# Altium PCB UF_Servo.PcbDoc (part 4 of 12)
Units mm, origin at the board's own origin, x right, y up, seen from the top; angles counter-clockwise.
Board outline 222.63 x 100.1 mm, 6 copper layers (L1, L2, L3, L4, L5, L6), stack 1.609 mm thick; 1138 components, 775 nets, 3720 pads, 1641 vias.
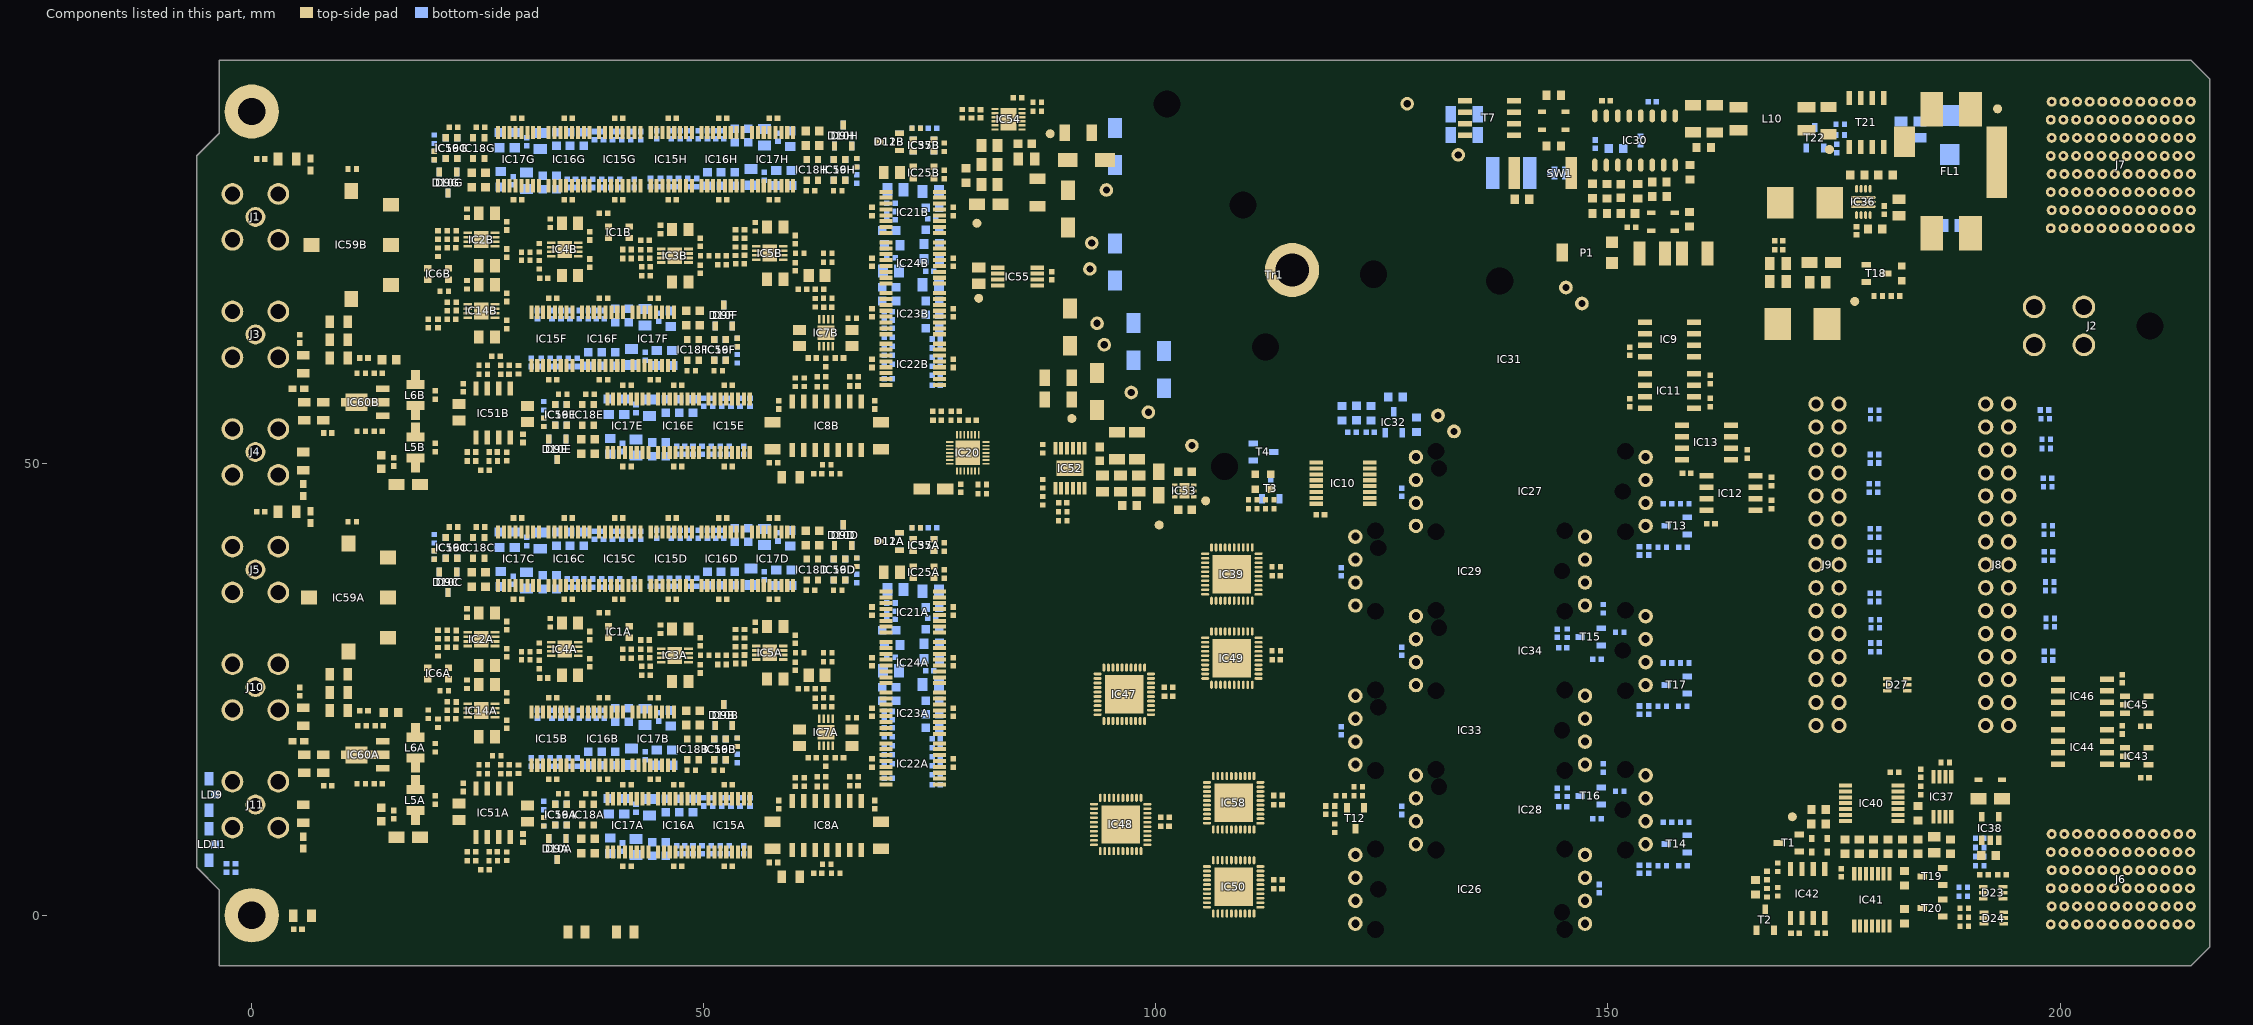
[diagram p7: the components of this part, seen from the top]

## Part data (continued)
C88A C88B: library part "0603 1uF 16V", "SMD Multilayer Ceramic Capacitor, 1 ï¿½F, 16 V, 0603 [1608 Metric], ï¿½ 5%, X7R", Case Code (Imperial)=0603, Case Code (Metric)=1608, Dielectric=X7R, Manufacturer=Yageo, Manufacturer Part Number=CC0603JRX7R7BB105, Max Operating Temperature=125°C, Min Operating Temperature=-55°C, Supplier Part Number=311-3485-1-ND, Tolerance=5%, Voltage Rating=16V, Case/Package=0603, Category="Ceramic Capacitors", ComponentLink1Description=http://www.yageo.com/documents/recent/UPY-GPHC_X7R_6.3V-to-50V_18.pdf?src-supplier=Digikey, ComponentLink1URL=http://www.yageo.com/documents/recent/UPY-GPHC_X7R_6.3V-to-50V_18.pdf?src-supplier=Digikey, ComponentLink2Description=https://www.yageo.com/upload/media/product/productsearch/datasheet/mlcc/UPY-GPHC_X7R_6.3V-to-50V_18.pdf?src-supplier=Digikey, ComponentLink2URL=https://www.yageo.com/upload/media/product/productsearch/datasheet/mlcc/UPY-GPHC_X7R_6.3V-to-50V_18.pdf?src-supplier=Digikey, ComponentLink3Description=https://datasheet.octopart.com/CC0603JRX7R7BB105-Yageo-datasheet-151948686.pdf?src-supplier=Farnell, ComponentLink3URL=https://datasheet.octopart.com/CC0603JRX7R7BB105-Yageo-datasheet-151948686.pdf?src-supplier=Farnell, ComponentLink4Description=https://datasheet.octopart.com/CC0603JRX7R7BB105-Yageo-datasheet-166511530.pdf?src-supplier=Future+Electronics, ComponentLink4URL=https://datasheet.octopart.com/CC0603JRX7R7BB105-Yageo-datasheet-166511530.pdf?src-supplier=Future+Electronics, ComponentLink5Description=https://datasheet.octopart.com/CC0603JRX7R7BB105-Yageo-datasheet-147453679.pdf?src-supplier=Newark, ComponentLink5URL=https://datasheet.octopart.com/CC0603JRX7R7BB105-Yageo-datasheet-147453679.pdf?src-supplier=Newark, Halogen Free=5694HalogenFree, Lead Free="Lead Free", Mounting Technology="Surface Mount", Packaging="Cut Tape", Pricing="1=0.2, 10=0.116, 100=0.0639, 1000=0.04383 (USD)", RoHS=Yes, Series=CC, Stock=7141, Supplier=Digikey, Voltage Rating (DC)=16V
C90A C90B C91A C91B: library part CC0402_470NF_16V_10%_X5R, "Non-polarised capacitor", Case=0402, Manufacturer=GENERIC, Manufacturer1 ComponentHeight=0.55mm, Manufacturer1 Example=TDK, Manufacturer1 Part Number=C1005X5R1C105KT, Tolerance=±10%, Voltage=16V, Author="CERN DEM JLC", Component Type=Standard, CreateDate=10/25/2012, HelpURL=\\cern.ch\dfs\Applications\Altium\Datasheets\CC0402_X5R_TDK_C.pdf, LatestRevisionDate=10/25/2012, Manufacturer Part Number=CC0402_470NF_16V_10%_X5R, Mounted=Yes, Part Description="SMD Multilayer Chip Ceramic Capacitor", Part Number=CC0402_470NF_16V_10%_X5R, Pin Count=2, Sense=No, SMD=Yes, Socket=No, Status=Preferred, TC=X5R
C130 C135: library part CC1206_10UF_25V_10%_X7R, "Non-polarised capacitor", Case=1206, Manufacturer=GENERIC, Manufacturer1 ComponentHeight=1.8mm, Manufacturer1 Example=KEMET, Manufacturer1 Part Number=C1206C106K4RACTU, Manufacturer Part Number=CC1206_10uF_25V_10%_X7R, Tolerance=±10%, Voltage=25V, Author="CERN DEM JLC", Component Type=Standard, CreateDate=2012-09-12, HelpURL=\\cern.ch\dfs\Applications\Altium\Datasheets\CC1206_X7R_KEMET.pdf, LatestRevisionDate=2012-09-12, Mounted=Yes, Part Description="SMD Multilayer Chip Ceramic Capacitor", Part Number=CC1206_10UF_25V_10%_X7R, Pin Count=2, SMD=Yes, Socket=No, Status=Preferred, Table="Capacitors SMD", TC=X7R
C137: library part CC1812_100NF_500V_10%_X7R, "Non-polarised capacitor", Case=1812, Manufacturer=GENERIC, Manufacturer1 ComponentHeight=2.5mm, Manufacturer1 Example=SYFER, Manufacturer1 Part Number=1812Y5000104KXB, Tolerance=±10%, Voltage=500V, Author="CERN DEM JMW", Component Type=Standard, CreateDate=1/23/2009, HelpURL=\\cern.ch\dfs\Applications\Altium\Datasheets\CC1812_X7R_SYFER.pdf, LatestRevisionDate=6/7/2011, Manufacturer Part Number=CC1812_100NF_500V_10%_X7R, Mounted=Yes, Part Description="SMD Multilayer Chip Ceramic Capacitor", Part Number=CC1812_100NF_500V_10%_X7R, Pin Count=2, Sense=No, SMD=Yes, Socket=No, Status=None, TC=X7R
C138 C146: library part CC0603_270PF_50V_5%_NP0, "Non-polarised capacitor", Case=0603, Manufacturer=GENERIC, Manufacturer1 ComponentHeight=0.87mm, Manufacturer1 Example=PHYCOMP, Manufacturer1 Part Number=223886715271, Tolerance=±5%, Voltage=50V, Author="CERN DEM JLC", Component Type=Standard, CreateDate=12/3/2007, HelpURL=\\cern.ch\dfs\Applications\Altium\Datasheets\CC0603_NP0_PHYCOMP.pdf, LatestRevisionDate=12/3/2007, Manufacturer Part Number=CC0603_270PF_50V_5%_NP0, Mounted=Yes, Part Description="SMD Multilayer Chip Ceramic Capacitor", Part Number=CC0603_270PF_50V_5%_NP0, Pin Count=2, Sense=No, SMD=Yes, Socket=No, Status=Preferred, TC=C0G/NP0
C139 C140: library part CMIC1210_220PF_100V_0.5PF_CORNELL_MC12F, "Non-polarised capacitor", Case=1210, Manufacturer="CORNELL DUBILIER", Manufacturer Part Number=MC12FA221D-F, Tolerance=±0.5pF, Voltage=100V, Author="CERN DEM JLC", Component Type=Standard, ComponentHeight=2mm, CreateDate=8/10/2011, HelpURL=\\cern.ch\dfs\Applications\Altium\Datasheets\CMIC1210_CORNELL_MC.pdf, LatestRevisionDate=8/10/2011, Mounted=Yes, Part Description="SMD RF Multilayer Mica Capacitor (Type MC)", Part Number=CMIC1210_220PF_100V_0.5PF_CORNELL_MC12F, Pin Count=2, Sense=No, SMD=Yes, Socket=No, Status="Not Recommended"
C142: library part CC0603_1NF_50V_5%_NP0, "Non-polarised capacitor", Case=0603, Manufacturer=GENERIC, Manufacturer1 ComponentHeight=0.9mm, Manufacturer1 Example="YAGEO PHYCOMP", Manufacturer1 Part Number=CC0603JRNPO9BN102, Tolerance=±5%, Voltage=50V, Author="CERN DEM JLC", Component Type=Standard, CreateDate=10/22/2012, HelpURL=\\cern.ch\dfs\Applications\Altium\Datasheets\CC0805_NP0_PHYCOMP_16VTO50V.pdf, LatestRevisionDate=10/22/2012, Manufacturer Part Number=CC0603_1NF_50V_5%_NP0, Mounted=Yes, Part Description="SMD Multilayer Chip Ceramic Capacitor", Part Number=CC0603_1NF_50V_5%_NP0, Pin Count=2, Sense=No, SMD=Yes, Socket=No, Status=Preferred, TC=C0G/NP0
C143 C144 C173 C182: library part CC0603_1UF_25V_10%_X7R, "Non-polarised capacitor", Case=0603, Manufacturer=GENERIC, Manufacturer1 ComponentHeight=0.9mm, Manufacturer1 Example=MURATA, Manufacturer1 Part Number=GRM188R71E105KA12D, Tolerance=±10%, Voltage=25V, Author="CERN DEM JLC", Component Type=Standard, HelpURL=\\cern.ch\dfs\Applications\Altium\Datasheets\CC0603_X7R_MURATA.pdf, Manufacturer Part Number=CC0603_1UF_25V_10%_X7R, Mounted=Yes, Part Description="SMD Multilayer Chip Ceramic Capacitor", Part Number=CC0603_1UF_25V_10%_X7R, Pin Count=2, Sense=No, SMD=Yes, Socket=No, Status=None, TC=X7R
  C143 C144: CreateDate=1/18/2011, LatestRevisionDate=1/18/2011
  C173 C182: CreateDate=18.01.2011, LatestRevisionDate=18.01.2011
C160 C161 C162 C165 C179 C210: library part CC0805_22UF_16V_10%_X5R, "Non-polarised capacitor", Case=0805, Manufacturer=GENERIC, Manufacturer1 ComponentHeight=1.35mm, Manufacturer1 Example=TDK, Manufacturer1 Part Number=C2012X5R1C226KT, Tolerance=±10%, Voltage=16V, Author="CERN DEM JLC", Component Type=Standard, CreateDate=25.10.2012, HelpURL=\\cern.ch\dfs\Applications\Altium\Datasheets\CC0805_X5R_TDK_C.pdf, LatestRevisionDate=25.10.2012, Manufacturer Part Number=CC0805_22UF_16V_10%_X5R, Mounted=Yes, Part Description="SMD Multilayer Chip Ceramic Capacitor", Part Number=CC0805_22UF_16V_10%_X5R, Pin Count=2, Sense=No, SMD=Yes, Socket=No, Status=Preferred, TC=X5R
C163 C195: library part CTE3216-18_10UF_16V_20%_AVX_TCJ, "Polarised capacitor", Case=A, Manufacturer=AVX, Manufacturer Part Number=TCJA106M016R0200, Tolerance=±20%, Voltage=16V, Author="CERN DEM JLC", Component Type=Standard, ComponentHeight=1.8mm, CreateDate=29.03.2012, HelpURL=\\cern.ch\dfs\Applications\Altium\Datasheets\CTE_AVX_TCJ.pdf, LatestRevisionDate=29.03.2012, Mounted=Yes, Part Description="ESR 0R200 Tantalum Solid Electrolytic Chip Capacitor with Conductive Polymer Electrode", Part Number=CTE3216-18_10UF_16V_20%_AVX_TCJ, Pin Count=2, Sense=No, SMD=Yes, Socket=No, Status=Preferred
C174: library part CTE3216-18_4.7UF_10V_10%_AVX_TPSA475K010T1400, "Polarised capacitor", Case=A, Manufacturer=AVX, Manufacturer Part Number=TPSA475K010T1400, Tolerance=±10%, Voltage=10V, Author="CERN DEM JLC", Component Type=Standard, ComponentHeight=1.8mm, CreateDate=23.01.2018, HelpURL=\\cern.ch\dfs\Applications\Altium\Datasheets\CTE-LESR_AVX_TPS-AUTO.pdf, LatestRevisionDate=23.01.2018, Mounted=Yes, Part Description="Low ESR 1R4 Automotive Solid Tantalum Chip Capacitor", Part Number=CTE3216-18_4.7UF_10V_10%_AVX_TPSA475K010T1400, Pin Count=2, Sense=No, SMD=Yes, Socket=No, Status=Preferred
C183A C183B: library part "0805 10uF 16V", "Multilayer Ceramic Capacitors MLCC - SMD/SMT 10V 10uF X7R 0805 5% AEC-Q200", Case Code (Imperial)=0805, Case Code (Metric)=2012, Dielectric=X7R, Dielectric Material=Ceramic, Manufacturer=KEMET, Manufacturer Part Number=C0805C106J8RACAUTO, Max Operating Temperature=125°C, Min Operating Temperature=-55°C, Ratings=AEC-Q200, Supplier Part Number=399-15693-1-ND, Tolerance=5%, Voltage Rating=10V, Case/Package=0805, Category="Ceramic Capacitors", ComponentLink1Description=http://www.farnell.com/datasheets/2741399.pdf?src-supplier=Farnell, ComponentLink1URL=http://www.farnell.com/datasheets/2741399.pdf?src-supplier=Farnell, ComponentLink2Description=http://www.farnell.com/datasheets/2741399.pdf?src-supplier=Element14, ComponentLink2URL=http://www.farnell.com/datasheets/2741399.pdf?src-supplier=Element14, ComponentLink3Description=https://datasheet.octopart.com/C0805C106J8RACAUTO-KEMET-datasheet-149523940.pdf?src-supplier=Farnell, ComponentLink3URL=https://datasheet.octopart.com/C0805C106J8RACAUTO-KEMET-datasheet-149523940.pdf?src-supplier=Farnell, ComponentLink4Description=https://api.kemet.com/component-edge/download/datasheet/C0805C106J8RACAUTO.pdf?src-supplier=Digikey, ComponentLink4URL=https://api.kemet.com/component-edge/download/datasheet/C0805C106J8RACAUTO.pdf?src-supplier=Digikey, ComponentLink5Description=http://www.farnell.com/datasheets/2741399.pdf?src-supplier=Newark, ComponentLink5URL=http://www.farnell.com/datasheets/2741399.pdf?src-supplier=Newark, ComponentLink6Description=https://datasheet.octopart.com/C0805C106J8RACAUTO-KEMET-datasheet-181957623.pdf?src-supplier=Newark, ComponentLink6URL=https://datasheet.octopart.com/C0805C106J8RACAUTO-KEMET-datasheet-181957623.pdf?src-supplier=Newark, ComponentLink7Description=https://datasheet.octopart.com/C0805C106J8RACAUTO-KEMET-datasheet-137036859.pdf?src-supplier=TME, ComponentLink7URL=https://datasheet.octopart.com/C0805C106J8RACAUTO-KEMET-datasheet-137036859.pdf?src-supplier=TME, Height=1.45mm, Material=Ceramic, Mounting Technology="Surface Mount", Packaging="Cut Tape", Pricing="1=0.88, 10=0.556, 100=0.3912, 1000=0.30524 (USD)", RoHS=Yes, RoHS Compliant=Yes, Series="SMD Auto X7R", Stock=9106, Supplier=Digikey, Voltage Rating (DC)=10V
C198 C204 C205 C211 C218A C218B: library part CC0603_4.7UF_25V_10%_X5R, "Non-polarised capacitor", Case=0603, Manufacturer=GENERIC, Manufacturer1 ComponentHeight=0.95mm, Manufacturer1 Example=MURATA, Manufacturer1 Part Number=GRM188R61E475KE11D, Tolerance=±10%, Voltage=25V, Author="CERN DEM JLC", Component Type=Standard, CreateDate=11/10/2014, HelpURL=\\cern.ch\dfs\Applications\Altium\Datasheets\CC0603_MURATA_GRM188R61E475KE11D.pdf, LatestRevisionDate=11/10/2014, Manufacturer Part Number=CC0603_4.7UF_25V_10%_X5R, Mounted=Yes, Part Description="SMD Multilayer Chip Ceramic Capacitor", Part Number=CC0603_4.7UF_25V_10%_X5R, Pin Count=2, Sense=No, SMD=Yes, Socket=No, Status=None, TC=X5R
C199 C206 C217A C217B: library part CTE3216-18_10UF_10V_10%_LESR1800, "Polarised capacitor", Case=A, Manufacturer=GENERIC, Manufacturer1 ComponentHeight=1.8mm, Manufacturer1 Example=AVX, Manufacturer1 Part Number=TPSA106K010R1800, Tolerance=±10%, Voltage=10V, Author="CERN DEM JLC", Component Type=Standard, CreateDate=5/5/2008, HelpURL=\\cern.ch\dfs\Applications\Altium\Datasheets\CTE-LESR_AVX_TPS.pdf, LatestRevisionDate=1/20/2009, Manufacturer Part Number=CTE3216-18_10UF_10V_10%_LESR1800, Mounted=Yes, Part Description="Low ESR 1R8 Solid Tantalum Chip Capacitor", Part Number=CTE3216-18_10UF_10V_10%_LESR1800, Pin Count=2, Sense=No, SMD=Yes, Socket=No, Status=Preferred
C214: library part CC0805_47UF_6.3V_10%_X5R, "Non-polarised capacitor", Case=0805, Manufacturer=GENERIC, Manufacturer1 ComponentHeight=1.4mm, Manufacturer1 Example=KEMET, Manufacturer1 Part Number=C0805C476K9PAC, Tolerance=±10%, Voltage=6.3V, Author="CERN DEM HF", Component Type=Standard, CreateDate=7/10/2023, HelpURL=\\cern.ch\dfs\Applications\Altium\Datasheets\CC0805_X5R_KEMET.pdf, LatestRevisionDate=7/10/2023, Manufacturer Part Number=CC0805_47UF_6.3V_10%_X5R, Mounted=Yes, Part Description="SMD Multilayer Chip Ceramic Capacitor", Part Number=CC0805_47UF_6.3V_10%_X5R, Pin Count=2, Sense=No, SMD=Yes, Socket=No, Status=Preferred, TC=X5R
C216A C216B C224A C224B: library part CC0402_47NF_25V_10%_X7R, "Non-polarised capacitor", Case=0402, Manufacturer=GENERIC, Manufacturer1 ComponentHeight=0.55mm, Manufacturer1 Example=TDK, Manufacturer1 Part Number=C1005X7R1E473K050, Tolerance=±10%, Voltage=25V, Author="CERN DEM JLC", Component Type=Standard, CreateDate=10/25/2012, HelpURL=\\cern.ch\dfs\Applications\Altium\Datasheets\CC0402_X7R_TDK_C.pdf, LatestRevisionDate=10/25/2012, Manufacturer Part Number=CC0402_47NF_25V_10%_X7R, Mounted=Yes, Part Description="SMD Multilayer Chip Ceramic Capacitor", Part Number=CC0402_47NF_25V_10%_X7R, Pin Count=2, Sense=No, SMD=Yes, Socket=No, Status=Preferred, TC=X7R
C225A C225B C226A C226B: library part CC0402_15PF_50V_5%_C0G, "Non-polarised capacitor", Case=0402, Manufacturer=GENERIC, Manufacturer1 ComponentHeight=0.55mm, Manufacturer1 Example=KEMET, Manufacturer1 Part Number=C0402C150J5GACTU, Tolerance=±5%, Voltage=50V, Author="CERN DEM JLC", Component Type=Standard, CreateDate=12/3/2007, HelpURL="\\cern.ch\dfs\Applications\Altium\Datasheets\CC0402_C0G_KEMET_(Commercial Grade).pdf", LatestRevisionDate=4/22/2015, Manufacturer Part Number=CC0402_15PF_50V_5%_C0G, Mounted=Yes, Part Description="SMD Multilayer Chip Ceramic Capacitor", Part Number=CC0402_15PF_50V_5%_C0G, Pin Count=2, Sense=No, SMD=Yes, Socket=No, Status=Preferred, TC=C0G/NP0
D1 D4 D7 D8: "Schottky Diode", Case=SOD-323, Manufacturer=INFINEON, Power=750mA, Voltage=40V, Author="CERN DEM JLC", Bonding=No, Component Type=Standard, ComponentHeight=1.1mm, CreateDate=11/12/2014, Device=BAT165, HelpURL=\\cern.ch\dfs\Applications\Altium\Datasheets\BAT165.pdf, LatestRevisionDate=11/12/2014, Manufacturer Part Number=BAT165, Mounted=Yes, PackageDescription="Small Outline Diode (SOD-323), 1.70mm W X 1.25mm L X 1.10mm H body,  IPC Medium Density", Part Description="Medium Power AF Schottky Diode", Part Number=BAT165, Pin Count=2, PressFit=No, Sense=No, SMD=Yes, Socket=No
D2 D3 D5 D6 D13 D14 D15 D16: "Schottky Diode", Case=DO-214AC, Manufacturer="VISHAY GENERAL SEMICONDUCTOR", Power=1A, Voltage=60V, Author="CERN DEM JLC", Bonding=No, Component Type=Standard, ComponentHeight=2.29mm, CreateDate=7/15/2008, Device=SS16, HelpURL=\\cern.ch\dfs\Applications\Altium\Datasheets\SS16.pdf, LatestRevisionDate=8/23/2010, Manufacturer Part Number=SS16, Mounted=Yes, PackageDescription="DO-214-AC/SMA Diode, Molded Body; 5.10mm L X 2.67mm W X 2.29mm H, IPC Medium Density", Part Description="Surface Mount Schottky Barrier Rectifier", Part Number=SS16, Pin Count=2, PressFit=No, Sense=No, SMD=Yes, Socket=No
D9A D9B D9C D9D D9E D9F D9G D9H D10A D10B D10C D10D D10E D10F D10G D10H D11A D11B D12A D12B: "Dual Common Cathode Varicap Diodes", Case=SOT23-3, Manufacturer="NXP SEMICONDUCTORS", Power=20mA, Voltage=15V, Author="CERN DEM JLC", Bonding=No, Component Type=Standard, ComponentHeight=1.1mm, CreateDate=12/16/2013, Device=BB201, HelpURL=\\cern.ch\dfs\Applications\Altium\Datasheets\BB201.pdf, LatestRevisionDate=12/16/2013, Manufacturer Part Number=BB201, Mounted=Yes, PackageDescription="SOT, 0.95mm Pitch; 3 Pin, 1.30mm W X 2.90mm L X 1.10mm H body, IPC Medium Density", Part Description="Dual Common Cathode Low-voltage Variable Capacitance Diode", Part Number=BB201, Pin Count=3, PressFit=No, Sense=No, SMD=Yes, Socket=No
D17A D17B D18A D18B D19A D19B: "Transient Voltage Suppressor Diode (Bi-Directional)", Case=0402, Manufacturer=EATON, Voltage=8kV, Author="CERN DEM MR", Bonding=No, Component Type=Standard, ComponentHeight=0.44mm, CreateDate=11/22/2019, Device=0402ESDA-MLP, HelpURL=\\cern.ch\dfs\Applications\Altium\Datasheets\0402ESDA-MLP.pdf, LatestRevisionDate=11/22/2019, Manufacturer Part Number=0402ESDA-MLP, Mounted=Yes, PackageDescription="0402, 2-Leads, Body 1.1mm L X 0.53mm W X 0.44mm H body, IPC Medium Density", Part Description="0.05pF 8kV Bidirectional ESD Voltage Suppressor", Part Number=0402ESDA-MLP, Pin Count=2, PressFit=No, Sense=No, SMD=Yes, Socket=No
D21: "Zener Diode", Case=DO-214AA, Manufacturer="FAIRCHILD SEMICONDUCTOR", Power=600W, Voltage=12V, Author="CERN DEM JLC", Bonding=No, Component Type=Standard, ComponentHeight=2.65mm, CreateDate=10.04.2013, Device=SMBJ12A, HelpURL=\\cern.ch\dfs\Applications\Altium\Datasheets\SMBJ.pdf, LatestRevisionDate=10.04.2013, Manufacturer Part Number=SMBJ12A, Mounted=Yes, PackageDescription="DO-214-AA/SMB Diode, Molded Body; 5.34mm L X 3.625mm W X 2.65mm H, IPC Medium Density", Part Description="Uni-Directional Transient Voltage Suppressor Diode", Part Number=SMBJ12A, Pin Count=2, PressFit=No, Sense=No, SMD=Yes, Socket=No
D22: "Schottky Diode", Case=SOD323, Manufacturer=INFINEON, Power=750mA, Voltage=40V, Author="CERN DEM JLC", Bonding=No, Component Type=Standard, ComponentHeight=1.1mm, CreateDate=12.11.2014, Device=BAT165, HelpURL=\\cern.ch\dfs\Applications\Altium\Datasheets\BAT165.pdf, LatestRevisionDate=12.11.2014, Manufacturer Part Number=BAT165, Mounted=Yes, PackageDescription="Small Outline Diode (SOD-323), 1.70mm W X 1.25mm L X 1.10mm H body,  IPC Medium Density", Part Description="Medium Power AF Schottky Diode", Part Number=BAT165, Pin Count=2, PressFit=No, Sense=No, SMD=Yes, Socket=No
D23 D24 D27: "Fivefold ESD Protection Diode Arrays", Case=SOT363, Manufacturer=NEXPERIA, Power=200W, Voltage=3.3V, Author="CERN DEM WB", Bonding=No, Component Type=Standard, ComponentHeight=1.1mm, CreateDate=05.07.2021, Device=PESD3V3L5UY, HelpURL=\\cern.ch\dfs\Applications\Altium\Datasheets\PESD3V3L5UY.pdf, LatestRevisionDate=05.07.2021, Manufacturer Part Number=PESD3V3L5UY, Mounted=Yes, PackageDescription="SOT363, SC-88, 0.65mm Pitch; 6 Pin, 1.25mm W X 2.00mm L X 1.10mm H body, IPC Medium Density", Part Description="Fivefold ESD Protection Diode Arrays (30kV)", Part Number=PESD3V3L5UY, Pin Count=6, PressFit=No, Sense=No, SMD=Yes, Socket=No
D25 D26: "Schottky Diode", Case=SOD-523F, Manufacturer=COMCHIP, Power=500mA, Voltage=20V, Author="CERN DEM HF", Bonding=No, Component Type=Standard, ComponentHeight=1mm, CreateDate=13.10.2023, Device=CDBU0520-HF, HelpURL=\\cern.ch\dfs\Applications\Altium\Datasheets\CDBU0520-HF.pdf, LatestRevisionDate=13.10.2023, Manufacturer Part Number=CDBU0520-HF, Mounted=Yes, PackageDescription="Small Outline Diode Flat Lead (SOD-523F), Body; 1.80mm L X 1mm W X 0.85mm H", Part Description="20V Surface mount Schottky Barrier Diode", Part Number=CDBU0520-HF, Pin Count=2, PressFit=No, Sense=No, SMD=Yes, Socket=No
FL1: library part FIL_MURATA_BNX022-01L, "Block Type EMIFIL (LC Combined)", Manufacturer=MURATA, Manufacturer Part Number=BNX022-01L, Resistance=0.5R, Author="CERN DEM JLC", Component Type=Standard, ComponentHeight=3.3mm, CreateDate=10.10.2012, HelpURL=\\cern.ch\dfs\Applications\Altium\Datasheets\FIL_MURATA_BNX022-01L.pdf, LatestRevisionDate=10.10.2012, Mounted=Yes, Part Description="Block Type EMIFIL (LC Combined) SMD Type, BNX02* Series", Part Number=FIL_MURATA_BNX022-01L, Pin Count=2, Sense=No, SMD=Yes, Socket=No, Status=None
IC1A IC1B IC6A IC6B IC18A IC18B IC18C IC18D IC18E IC18F IC18G IC18H IC19A IC19B IC19C IC19D IC19E IC19F IC19G IC19H IC25A IC25B IC35A IC35B IC56A IC56B IC56C IC56D IC56E IC56F IC56G IC56H IC57A IC57B: "PhotoMOS Relay", Case=SON4, Manufacturer=PANASONIC, Author="CERN DEM JLC", Bonding=No, Component Type=Standard, ComponentHeight=1.4mm, ComponentLink1Description="Package Drawing", ComponentLink1URL=\\cern.ch\dfs\Applications\Altium\Datasheets\AQY22_Package-Drawing.pdf, CreateDate=1/18/2010, Device=AQY221N3M, HelpURL=\\cern.ch\dfs\Applications\Altium\Datasheets\AQY221N3M.pdf, LatestRevisionDate=12/5/2018, Manufacturer Part Number=AQY221N3M, Mounted=Yes, PackageDescription="PANASONIC Serie AQY22(SON), 1.27mm Pitch; 4 Pin, 2.95mm W X 2.20mm L X 1.60mm H body", Part Description="RF SON 1 Form A, PhotoMOS Relay, CxR5 (On Res. 5.5Ohm, Out Cap. 1.1pF), 25V 150mA", Part Number=AQY221N3M, Pin Count=4, PressFit=No, Sense=No, SMD=Yes, Socket=No
IC2A IC2B IC3A IC3B IC4A IC4B IC5A IC5B IC7A IC7B IC14A IC14B: "Unity-Gain Stable, Ultralow Distortion, 1 nV/sqrt Hz Voltage Noise, High Speed Operational Amplifier", Case=SON8, Manufacturer="ANALOG DEVICES", Manufacturer Part Number=ADA4899-1YCP, Author="CERN DEM JLC", Bonding=No, Component Type=Standard, ComponentHeight=0.9mm, CreateDate=1/13/2010, Device=ADA4899-1YCPZ, HelpURL=\\cern.ch\dfs\Applications\Altium\Datasheets\ADA4899-1YCPZ.pdf, LatestRevisionDate=3/31/2022, Mounted=Yes, PackageDescription="SON (DFN), 0.50mm Pitch; 8 Pin, 3.00mm W X 3.00mm L X 0.90mm H body (w/Thermal Tab 1.60 X 1.89mm), IPC Medium Density", Part Description="Unity-Gain Stable, Ultralow Distortion, 1nV/sqrt Hz Voltage Noise, High Speed Operational Amplifier", Part Number=ADA4899-1YCPZ, Pin Count=8, PressFit=No, Sense=No, SMD=Yes, Socket=No
IC8A IC8B: "Ultra-Wideband, > 40-dB Gain Adjust Range, Linear in V/V Variable Gain Amplifier", Case=SOIC14, Manufacturer="TEXAS INSTRUMENTS", Author="CERN DEM HF", Bonding=No, Component Type=Standard, ComponentHeight=1.75mm, CreateDate=9/22/2022, Device=VCA824ID, HelpURL=\\cern.ch\dfs\Applications\Altium\Datasheets\VCA824.pdf, LatestRevisionDate=9/22/2022, Manufacturer Part Number=VCA824ID, Mounted=Yes, PackageDescription="SOIC 14, Pitch 1.27mm - Body 4x8.75mm, IPC Medium Density", Part Description="Ultra-Wideband, > 40-dB Gain Adjust Range, Linear in V/V Variable Gain Amplifier", Part Number=VCA824ID, Pin Count=14, PressFit=No, Sense=No, SMD=Yes, Socket=No
IC9: library part FIN1027A, "3.3V LVDS, 2-Bit, High-Speed, Differential Driver", Case=SOIC8, Manufacturer="ON Semiconductor", Author=GK, Bonding=No, Component Type=Standard, ComponentHeight=0.8mm, CreateDate=08/11/2016, Device=FIN1027AMX, HelpURL=\\cern.ch\dfs\Applications\Altium\Datasheets\FIN1101K8X.pdf, LatestRevisionDate=08/11/2016, Manufacturer Part Number=FIN1027AMX, Mounted=Yes, PackageDescription="SOIC 8, Pitch 1.27mm - Body 4x5mm, IPC Medium Density", Part Description="3.3V LVDS, 2-Bit, High-Speed, Differential Driver", Part Number=FIN1027AMX, Pin Count=8, PressFit=No, Sense=No, SMD=Yes, Socket=No
IC10: "3-Line to 8-Line Decoder/Demultiplexer", Case=TSSOP16, Manufacturer="NXP SEMICONDUCTORS", Author="CERN DEM JLC", Bonding=No, Component Type=Standard, ComponentHeight=1.1mm, CreateDate=6/9/2015, Device=74HC138PW, HelpURL=\\cern.ch\dfs\Applications\Altium\Datasheets\74HC138PW.pdf, LatestRevisionDate=6/9/2015, Manufacturer Part Number=74HC138PW, Mounted=Yes, PackageDescription="SOP, 0.65mm Pitch; 16 Pin, 4.40mm W X 5.00mm L X 1.10mm H body IPC Medium Density", Part Description="3-Line to 8-Line Decoder/Demultiplexer, Inverting", Part Number=74HC138PW, Pin Count=16, PressFit=No, Sense=No, SMD=Yes, Socket=No
IC11 IC12 IC13: library part FIN1028, "3.3V LVDS 2-Bit High-Speed Differential Reciever", Case=SOIC8, Manufacturer="ON Semiconductor", Author=GK, Bonding=No, Component Type=Standard, ComponentHeight=0.8mm, CreateDate=08/11/2016, Device=FIN1028MX, HelpURL=\\cern.ch\dfs\Applications\Altium\Datasheets\FIN1101K8X.pdf, LatestRevisionDate=08/11/2016, Manufacturer Part Number=FIN1028MX, Mounted=Yes, PackageDescription="SOIC 8, Pitch 1.27mm - Body 4x5mm, IPC Medium Density", Part Description="3.3V LVDS 2-Bit High-Speed Differential Reciever", Part Number=FIN1028MX, Pin Count=8, PressFit=No, Sense=No, SMD=Yes, Socket=No
IC15A IC15B IC15C IC15D IC15E IC15F IC15G IC15H IC16A IC16B IC16C IC16D IC16E IC16F IC16G IC16H IC17A IC17B IC17C IC17D IC17E IC17F IC17G IC17H IC21A IC21B IC22A IC22B IC23A IC23B IC24A IC24B: "DG211B Series SPST 22 V 50 Ohm Surface Mount Improved Analog Switch - TSSOP-16", Case/Package=TSSOP, Manufacturer="Vishay Siliconix", Max Dual Supply Voltage=22V, Max Operating Temperature=85°C, Max Power Dissipation=640mW, Max Supply Current=10uA, Max Supply Voltage=25V, Min Dual Supply Voltage=4.5V, Min Operating Temperature=-40°C, Package Quantity=3000, Supplier Part Number=DG211BDQ-T1-E3CT-ND, Supply Current=50uA, Category="Decoders and Multiplexers", ComponentLink1Description=https://datasheet.ciiva.com/26911/getdatasheetpartid-399112-26911024.pdf?src-supplier=Verical, ComponentLink1URL=https://datasheet.ciiva.com/26911/getdatasheetpartid-399112-26911024.pdf?src-supplier=Verical, ComponentLink2Description=https://datasheet.ciiva.com/23943/1759079-23943571.pdf?src-supplier=Newark, ComponentLink2URL=https://datasheet.ciiva.com/23943/1759079-23943571.pdf?src-supplier=Newark, ComponentLink3Description=https://datasheet.ciiva.com/6639/70040-6639199.pdf?src-supplier=Digikey, ComponentLink3URL=https://datasheet.ciiva.com/6639/70040-6639199.pdf?src-supplier=Digikey, Height=0.92mm, Lead Free="Lead Free", Length=5.08mm, Manufacturer Part Number=DG211BDQ-T1-E3, Min Supply Voltage=4.5V, Mounting Technology="Surface Mount", Number of Channels=4, Number of Circuits=4, Number of Inputs=4, Number of Outputs=4, Packaging="Tape and Reel", Pins=16, Power Dissipation=640mW, Pricing="1=2.28, 10=1.689, 25=1.5416, 100=1.3792, 250=1.30176, 500=1.2551, 1000=1.2167 (USD)", Radiation Hardening=No, Reach SVHC Compliant=Unknown, RoHS=Yes, RoHS Compliant=Yes, Series=-, Stock=12512, Supplier=Digikey, Supply Type=Single,Dual, Throw Configuration=SPST, Weight=0.006102oz, Width=4.4mm
IC20: "12-Bit nanoDAC+ with 2 ppm/°C Voltage Reference Temperature Coefficient, SPI Interface", Case=QFN28, Manufacturer="ANALOG DEVICES", Author="CERN DEM HF", Bonding=No, Component Type=Standard, ComponentHeight=1.0mm, CreateDate=4/19/2022, Device=AD5674RBCPZ-1, HelpURL=\\cern.ch\dfs\Applications\Altium\Datasheets\AD5674RBCPZ-1.pdf, LatestRevisionDate=4/19/2022, Manufacturer Part Number=AD5674RBCPZ-1, Mounted=Yes, PackageDescription="QFN, 0.40mm Pitch, Square; 28 Pin, 4.00mm L X 4.00mm W X 1.00mm H body (w/Thermal Tab 2.70 X 2.70mm), IPC Medium Density", Part Description="12-Bit nanoDAC+ with 2 ppm/°C Voltage Reference Temperature Coefficient, SPI Interface", Part Number=AD5674RBCPZ-1, Pin Count=28, PressFit=No, Sense=No, SMD=Yes, Socket=No
IC26 IC27 IC28 IC29 IC33 IC34: "High Voltage Galvanic Insulation Link for DC to 5MBaud", Manufacturer=BROADCOM, Author="CERN DEM HF", Bonding=No, Component Type=Standard, ComponentHeight=6.7mm, CreateDate=2/10/2022, Device=AFBR-390525RZ, HelpURL=\\cern.ch\dfs\Applications\Altium\Datasheets\AFBR-390525RZ.pdf, LatestRevisionDate=3/21/2022, Manufacturer Part Number=AFBR-390525RZ, Mounted=Yes, PackageDescription="BROADCOM AFBR-390525RZ Case, Body 30.46mm L X 10.16mm W X 6.7mm H", Part Description="High Voltage Galvanic Insulation Link for DC to 5MBaud, Length 25mm, 15kV Voltage Suppression", Part Number=AFBR-390525RZ, Pin Count=8, PressFit=No, Sense=No, SMD=No, Socket=No
IC30: "Improved high-voltage resonant controller", Case=SOP, Manufacturer=STMicroelectronics, Author="Michal Beldyga", Component Type=Standard, CreateDate=2/9/2025, Device=L6599AD, LastRevision=2/9/2025, Manufacturer Part Number=L6599AD, PackageDescription="SOP, 16-Leads, Body 9.90x3.90mm, Pitch 1.27mm, IPC Medium Density", Part Description="Improved high-voltage resonant controller", Part Number=L6599AD, Pin Count=16, Status=Active
IC31: "Optocoupler", Manufacturer="TT Electronics", Author="Michal Beldyga", Component Type=Standard, CreateDate=2/9/2025, Device=OPI1264C, LastRevision=2/9/2025, Manufacturer Part Number=OPI1264C, PackageDescription="Low‐cost plastic housing", Part Description="Optically Coupled Isolator", Part Number=OPI1264C, Pin Count=4, Status=Active
IC32: "Precision Reference 1=Cathode 2=Adj 3=Anode", Case=SOT23-3, Manufacturer="TEXAS INSTRUMENTS", Author="CERN DEM JMW", Bonding=No, Component Type=Standard, ComponentHeight=1.12mm, CreateDate=10/22/2015, Device=TL431AIDBZ, HelpURL=\\cern.ch\dfs\Applications\Altium\Datasheets\TL431AIDBZ.pdf, LatestRevisionDate=10/22/2015, Manufacturer Part Number=TL431AIDBZ, Mounted=Yes, PackageDescription="SOT, 0.95mm, Pitch; 3 Pin,1.30mm W X 2.92mm L X 1.12mm H body, IPC Medium Density", Part Description="Vref (2.495V) To 36V 1% Precision Programmable Reference", Part Number=TL431AIDBZ, Pin Count=3, PressFit=No, Sense=No, SMD=Yes, Socket=No
IC36: "3V-17V 2A Step-Down Converter, High Accuracy, With DCS-Control", Case=QFN14, Manufacturer="TEXAS INSTRUMENTS", Author="CERN DEM MR", Bonding=No, Component Type=Standard, ComponentHeight=1mm, CreateDate=08.02.2019, Device=TPS62148RGX, HelpURL=\\cern.ch\dfs\Applications\Altium\Datasheets\TPS62148RGX.pdf, LatestRevisionDate=08.02.2019, Manufacturer Part Number=TPS62148RGX, Mounted=Yes, PackageDescription="TEXAS Case Style (R-VQFN-HR-N11), 0.50mm Pitch, 11 Pin, 2.00mm W X 3.00mm L X 1.00mm H body", Part Description="3V-17V 2A Step-Down Converter, High Accuracy, with DCS-Control", Part Number=TPS62148RGX, Pin Count=11, PressFit=No, Sense=No, SMD=Yes, Socket=No
IC37: "Digital Temperature Sensor and Thermal Watchdog with Two-Wire Interface", Case=SSOP8, Manufacturer="TEXAS INSTRUMENTS", Author="CERN DEM JLC", Bonding=No, Component Type=Standard, ComponentHeight=1.09mm, CreateDate=15.10.2012, Device=LM75AIMM/NOPB, HelpURL=\\cern.ch\dfs\Applications\Altium\Datasheets\LM75AIMM-NOPB.pdf, LatestRevisionDate=15.10.2012, Manufacturer Part Number=LM75AIMM/NOPB, Mounted=Yes, PackageDescription="SOP, 0.65mm pitch; 8 pin,3.00mm W X 3.00mm L X 1.09mm H bodyI, PC Medium Density", Part Description="-25° to +100°C ±2°C Digital Temperature Sensor and Thermal Watchdog with Two-Wire Interface", Part Number=LM75AIMM/NOPB, Pin Count=8, PressFit=No, Sense=No, SMD=Yes, Socket=No
IC38: "500mA Peak Output LDO Regulator", Case=SOT23-5, Manufacturer="MICROCHIP TECHNOLOGY", Author="CERN DEM WB", Bonding=No, Component Type=Standard, ComponentHeight=1.45mm, CreateDate=2019-04-16, Device=MIC5219-3.3YM5, HelpURL=\\cern.ch\dfs\Applications\Altium\Datasheets\MIC5219-3.3YM5.pdf, LatestRevisionDate=2019-04-16, Manufacturer Part Number=MIC5219-3.3YM5, Mounted=Yes, PackageDescription="SOT, 0.95mm pitch; 5 pin, 1.60mm W X 2.90mm L X 1.45mm H body, IPC Medium Density", Part Description="3.3V 500mA Peak Output Low Drop-Out  (LDO) Regulator", Part Number=MIC5219-3.3YM5, Pin Count=5, PressFit=No, Sense=No, SMD=Yes, Socket=No
IC39 IC47 IC48 IC49 IC50 IC58: "4-Wire-Interfaced, 2.5V to 5.5V, 28-Port I/O Expander", Case=QFN40, Manufacturer=MAXIM, Manufacturer Part Number=MAX7301ATL, Author="CERN DEM BC", Bonding=No, Component Type=Standard, ComponentHeight=0.8mm, CreateDate=5/4/2020, Device=MAX7301ATL+, HelpURL=\\cern.ch\dfs\Applications\Altium\Datasheets\MAX7301ATL+.pdf, LatestRevisionDate=4/4/2022, Mounted=Yes, PackageDescription="QFN, 0.50mm Pitch, Square; 40 Pin, 6.00mm L X 6.00mm W X 0.80mm H body (w/Thermal Tab 4.25 X 4.25mm), IPC Medium Density", Part Description="4-Wire-Interfaced, 2.5V to 5.5V, 28-Port I/O Expander", Part Number=MAX7301ATL+, Pin Count=41, PressFit=No, Sense=No, SMD=Yes, Socket=No
IC40 IC41: Case=TSSOP14, Manufacturer="NXP SEMICONDUCTORS", Author="CERN DEM JLC", Bonding=No, Component Type=Standard, ComponentHeight=1.1mm, CreateDate=2014-11-19, Device=74HC4066PW, HelpURL=\\cern.ch\dfs\Applications\Altium\Datasheets\74HC4066PW.pdf, LatestRevisionDate=2014-11-19, Manufacturer Part Number=74HC4066PW, Mounted=Yes, PackageDescription="SOP, 14-Leads, Body 4.4x5mm (max), Pitch 0.65mm, IPC Medium Density", Part Description="Quad Single-Pole Single-Throw Analog Switch", Part Number=74HC4066PW, Pin Count=14, PressFit=No, SMD=Yes, Socket=No, Table="Standard Logic"
IC42: "LinCMOS Timer", Case=SOIC8, Manufacturer="TEXAS INSTRUMENTS", Author="CERN DEM JMW", Bonding=No, Component Type=Standard, ComponentHeight=1.75mm, CreateDate=23.08.2016, Device=TLC555ID, HelpURL=\\cern.ch\dfs\Applications\Altium\Datasheets\TLC555ID.pdf, LatestRevisionDate=23.08.2016, Manufacturer Part Number=TLC555ID, Mounted=Yes, PackageDescription="SOIC 8, Pitch 1.27mm, Body 4x5mm, IPC Medium Density", Part Description="LinCMOS Timer", Part Number=TLC555ID, Pin Count=8, PressFit=No, Sense=No, SMD=Yes, Socket=No
IC43 IC45: "1.7V-5.5V, 2K I2C Serial EEPROM With EUI-48 Node Identity", Case=SOT23-5, Manufacturer="MICROCHIP TECHNOLOGY", Author="CERN DEM MR", Bonding=No, Component Type=Standard, ComponentHeight=1.45mm, CreateDate=31.03.2016, Device=24AA02E48T-I/OT, HelpURL=\\cern.ch\dfs\Applications\Altium\Datasheets\24AA02E48T-I-OT.pdf, LatestRevisionDate=31.03.2016, Manufacturer Part Number=24AA02E48T-I/OT, Mounted=Yes, PackageDescription="SOT, 0.95mm pitch; 5 pin, 1.60mm W X 2.90mm L X 1.45mm H body, IPC Medium Density", Part Description="1.7V-5.5V, 2K I2C Serial EEPROM with EUI-48 Node Identity", Part Number=24AA02E48T-I/OT, Pin Count=5, PressFit=No, Sense=No, SMD=Yes, Socket=No
IC44 IC46: "1.7V-5.5V, 2K I2C™ Serial EEPROMs with EUI-48™ Node Identity", Case=SOIC8, Manufacturer="MICROCHIP TECHNOLOGY", Author="CERN DEM MR", Bonding=No, Component Type=Standard, ComponentHeight=1.75mm, CreateDate=19.07.2016, Device=24AA025E48-I/SN, HelpURL=\\cern.ch\dfs\Applications\Altium\Datasheets\24AA025E48-I-SN.pdf, LatestRevisionDate=19.07.2016, Manufacturer Part Number=24AA025E48-I/SN, Mounted=Yes, PackageDescription="SOIC 8, Pitch 1.27mm - Body 4x5mm, IPC Medium Density", Part Description="1.7V-5.5V, 2K I2C™ Serial EEPROMs with EUI-48™ Node Identity", Part Number=24AA025E48-I/SN, Pin Count=8, PressFit=No, Sense=No, SMD=Yes, Socket=No
IC51A IC51B: "Dual Operational Amplifier", Case=SOIC8, Manufacturer="ANALOG DEVICES", Manufacturer Part Number=ADA4841-2YR, Author="CERN DEM JLC", Bonding=No, Component Type=Standard, ComponentHeight=1.75mm, CreateDate=5/12/2011, Device=ADA4841-2YRZ, HelpURL=\\cern.ch\dfs\Applications\Altium\Datasheets\ADA4841-2YRZ.pdf, LatestRevisionDate=3/31/2022, Mounted=Yes, PackageDescription="SOIC 8, Pitch 1.27mm - Body 4x5mm, IPC Medium Density", Part Description="Dual Low Power, Low Noise and Distortion, Rail-to-Rail Output Amplifier", Part Number=ADA4841-2YRZ, Pin Count=8, PressFit=No, Sense=No, SMD=Yes, Socket=No
IC52: "20V, 500mA, Ultralow Noise, Ultrahigh PSRR Linear Regulator", Case=MSOP12, Manufacturer="LINEAR TECHNOLOGY", Author="CERN DEM HF", Bonding=No, Component Type=Standard, ComponentHeight=1.1mm, CreateDate=5/18/2022, Device=LT3045EMSE, HelpURL=\\cern.ch\dfs\Applications\Altium\Datasheets\LT3045.pdf, LatestRevisionDate=5/18/2022, Manufacturer Part Number=LT3045EMSE, Mounted=Yes, PackageDescription="SOP, 0.65mm Pitch; 12 Pin, 3.00mm W X 4.039mm L X 1.10mm H body (w/Thermal Tab 1.75 X 2.94 mm), IPC Medium Density", Part Description="20V, 500mA, Ultralow Noise, Ultrahigh PSRR Linear Regulator", Part Number=LT3045EMSE, Pin Count=13, PressFit=No, Sense=No, SMD=Yes, Socket=No
IC53: "3.3V, 500mA Low-Noise, Low-IQ LDO", Case=SON6, Manufacturer="TEXAS INSTRUMENTS", Author="CERN DEM JLC", Bonding=No, Component Type=Standard, ComponentHeight=0.8mm, CreateDate=6/6/2017, Device=LP5912-3.3DRVT, HelpURL=\\cern.ch\dfs\Applications\Altium\Datasheets\LP5912-3.3DRVT.pdf, LatestRevisionDate=6/6/2017, Manufacturer Part Number=LP5912-3.3DRVT, Mounted=Yes, PackageDescription="SON, 0.65mm Pitch; 6 Pin, 2.00mm W X 2.00mm L X 0.80mm H body (w/Thermal Tab 1.10 X 1.70mm),  IPC Medium Density", Part Description="3.3V, 500mA Low-Noise, Low-IQ, LDO Linear Regulator", Part Number=LP5912-3.3DRVT, Pin Count=7, PressFit=No, Sense=No, SMD=Yes, Socket=No
IC54: library part LT3094EDD#PBF, "-20V, 500mA, Ultralow Noise, Ultrahigh PSRR Negative Linear Regulator", Case=SON12, Manufacturer="LINEAR TECHNOLOGY", Author="CERN DEM JLC", Bonding=No, Component Type=Standard, ComponentHeight=0.8mm, CreateDate=11/12/2018, Device=LT3094EDD, HelpURL=\\cern.ch\dfs\Applications\Altium\Datasheets\LT3094EDD#PBF.pdf, LatestRevisionDate=2/3/2022, Manufacturer Part Number=LT3094EDD, Mounted=Yes, PackageDescription="SON, 0.45mm Pitch; 12 Pin, 3.00mm W X 3.00mm L X 0.80mm H body (w/Thermal Tab 1.75 X 2.48mm), IPC Medium Density", Part Description="-20V, 500mA, Ultralow Noise, Ultrahigh PSRR Negative Linear Regulator", Part Number=LT3094EDD#PBF, Pin Count=13, PressFit=No, Sense=No, SMD=Yes, Socket=No
IC55: "V-Ref Precision 2.5V 5mA Automotive 8-Pin MSOP T/R", Case/Package=MSOP, Manufacturer="Analog Devices / Linear Technology", Max Operating Temperature=125°C, Max Output Voltage=2.5V, Min Operating Temperature=-40°C, Output Current=5mA, Package Quantity=2500, Quiescent Current=7mA, Supplier Part Number=584-C6655BHMS82.5TPF, Temperature Coefficient=2ppm/°C, Tolerance=0.025%, Category="Voltage References", ComponentLink1Description=https://datasheet.ciiva.com/2011/28576-2011089.pdf?src-supplier=Digikey, ComponentLink1URL=https://datasheet.ciiva.com/2011/28576-2011089.pdf?src-supplier=Digikey, Manufacturer Part Number=LTC6655BHMS8-2.5#TRPBF, Mounting Technology="Surface Mount", Number of Channels=1, Output Voltage=2.5V, Packaging="Tape and Reel", Pins=8, Pricing="1=15.39, 10=11.19, 50=9.94, 100=8.55, 1000=8.55, 10000=8.54 (USD)", Reference Type=Series, RoHS=Yes, RoHS Compliant=Yes, Stock=1199, Supplier=Mouser
IC59A IC59B: "50 Ohm, 1 to 100MHz, High Output, Phase Detector", Manufacturer=MINI-CIRCUITS, Manufacturer Part Number=SYPD-1, Author="CERN DEM BC", Bonding=No, Component Type=Standard, ComponentHeight=5.84mm, CreateDate=1/23/2020, Device=SYPD-1+, HelpURL=\\cern.ch\dfs\Applications\Altium\Datasheets\SYPD-1+.pdf, LatestRevisionDate=6/24/2022, Mounted=Yes, PackageDescription="MINI-CIRCUITS TTT167 Case, 6 pin, 9.65mm W X 12.7mm L", Part Description="50 Ohm, 1 to 100MHz, High Output, Phase Detector", Part Number=SYPD-1+, Pin Count=6, PressFit=No, Sense=No, SMD=Yes, Socket=No
IC60A IC60B: "Monolithic Amplifier", Manufacturer=MINI-CIRCUITS, Manufacturer Part Number=GVA-81, Author="CERN DEM JLC", Bonding=No, Component Type=Standard, ComponentHeight=1.6mm, CreateDate=11/3/2009, Device=GVA-81+, HelpURL=\\cern.ch\dfs\Applications\Altium\Datasheets\GVA-81+.pdf, LatestRevisionDate=6/9/2022, Mounted=Yes, PackageDescription="MINI-CIRCUITS DF782 Case, 1.50mm pitch; 4 pin, 2.44mm W X 4.49mm L", Part Description="DC-7GHz, 5Volt-Surface Mount Monolithic Amplifier", Part Number=GVA-81+, Pin Count=4, PressFit=No, Sense=No, SMD=Yes, Socket=No
J1 J3 J4 J5 J10 J11: library part 132203-12, "RF Connector SMA Right Angle PCB Jack Through Hole 50 Ohm Bulkhead", Manufacturer="Amphenol Connex", Supplier Part Number=523-132203-12, Category="RF / Coaxial Connectors", ComponentLink1Description=https://datasheet.ciiva.com/24241/132203-12-customer-drawing-24241088.pdf?src-supplier=Mouser, ComponentLink1URL=https://datasheet.ciiva.com/24241/132203-12-customer-drawing-24241088.pdf?src-supplier=Mouser, ComponentLink2Description=https://datasheet.ciiva.com/647/132203-12-647032.pdf?src-supplier=Digikey, ComponentLink2URL=https://datasheet.ciiva.com/647/132203-12-647032.pdf?src-supplier=Digikey, Manufacturer Part Number=132203-12, Pricing="1=20.22, 10=18.65, 50=18.65, 100=18.65, 1000=18.65, 10000=18.65 (USD)", RoHS=Yes, Stock=515, Supplier=Mouser
J2: library part MOLEX_39-30-0040, "Connector 4 Male", Manufacturer=MOLEX, Manufacturer Part Number=39-30-0040, Author="CERN DEM JLC", Component Type=Standard, ComponentHeight=11.4mm, CreateDate=2018-10-02, Family="Mini-Fit Jr.™", HelpURL=\\cern.ch\dfs\Applications\Altium\Datasheets\MOLEX_39-30-0040.pdf, LatestRevisionDate=2018-10-02, Mounted=Yes, Part Description="4.20mm (.165\") Pitch Mini-Fit Jr. Header, Dual Row, Right Angle with Snap-in Plastic Peg PCB Lock, 4 Circuits", Part Number=MOLEX_39-30-0040, Pin Count=4, PressFit=No, Sense=No, SMD=No, Socket=No, Status=None
J6: library part AMPHENOL_10052825-101LF, "72 Contacts Header, 6 Columns, 4 Pairs per Column", Manufacturer=AMPHENOL, Manufacturer Part Number=10052825-101LF, Author="CERN DEM MR", ClassName=Overlapping, Component Type=Standard, ComponentHeight=15.35mm, ComponentLink1Description=Application, ComponentLink1URL=\\cern.ch\dfs\Applications\Altium\Datasheets\AMPHENOL_10052825-101LF_Application.pdf, CreateDate=19/02/2018, Family="AirMax VS", HelpURL=\\cern.ch\dfs\Applications\Altium\Datasheets\AMPHENOL_10052825-101LF.pdf, LatestRevisionDate=19/02/2018, Mounted=Yes, Part Description="72 Contacts, 2mm Pitch, 6 Columns, 4 Pairs per Column, 4 Walls, Right Angle Header", Part Number=AMPHENOL_10052825-101LF, Pin Count=72, PressFit=Yes, Sense=No, SMD=No, Socket=No, Status=None
J7: library part AMPHENOL_10052838-101LF, "96 Contacts Header, 8 Columns, 4 Pairs per Column", Manufacturer=AMPHENOL, Manufacturer Part Number=10052838-101LF, Author="CERN DEM MR", Component Type=Standard, ComponentHeight=15.35mm, ComponentLink1Description=Application, ComponentLink1URL=\\cern.ch\dfs\Applications\Altium\Datasheets\AMPHENOL_10052838-101LF_Application.pdf, CreateDate=19.02.2018, Family="AirMax VS", HelpURL=\\cern.ch\dfs\Applications\Altium\Datasheets\AMPHENOL_10052838-101LF.pdf, LatestRevisionDate=19.02.2018, Mounted=Yes, Part Description="96 Contacts, 2mm Pitch, 8 Columns, 4 Pairs per Column, 4 Walls, Right Angle Header", Part Number=AMPHENOL_10052838-101LF, Pin Count=96, PressFit=Yes, Sense=No, SMD=No, Socket=No, Status=None
J8 J9: library part 3M_N2530-6002RB, "Connector 30 Male", Manufacturer=3M, Manufacturer Part Number=N2530-6002RB, Author="CERN DEM JLC", Component Type=Standard, ComponentHeight=10.03mm, CreateDate=11.02.2009, Family="Header 30", HelpURL=\\cern.ch\dfs\Applications\Altium\Datasheets\3M_N2530-6002RB.pdf, LatestRevisionDate=11.08.2009, Mounted=Yes, Part Description="30 Contacts - Straight .100'' x .100'' Low Profile Four-Wall Header, 2500 Series", Part Number=3M_N2530-6002RB, Pin Count=30, PressFit=No, Sense=No, SMD=No, Socket=No, Status=None
L1 L9: library part IND_1.5UH_20%_WURTH_WE-LHMI_74437349015, "Inductor With Core", Manufacturer="WURTH ELEKTRONIK", Manufacturer Part Number=74437349015, Power=8A, Resistance=0.0086R, Tolerance=±20%, Author="CERN DEM MR", Component Type=Standard, ComponentHeight=5mm, CreateDate=27.05.2016, HelpURL=\\cern.ch\dfs\Applications\Altium\Datasheets\IND_WURTH_WE-LHMI_74437349015.pdf, LatestRevisionDate=27.05.2016, Mounted=Yes, Part Description="SMD Power Inductor (WE-LHMI Series)", Part Number=IND_1.5UH_20%_WURTH_WE-LHMI_74437349015, Pin Count=2, Sense=No, SMD=Yes, Socket=No
L2A L2B: library part IND0805_1UH_20%_WURTH_74479773210, "Inductor", Case=0805, Manufacturer="WURTH ELEKTRONIK", Manufacturer Part Number=74479773210, Power=800mA, Resistance=0.18R, Tolerance=±20%, Author="CERN DEM BC", Component Type=Standard, ComponentHeight=0.6mm, CreateDate=8/26/2019, HelpURL=\\cern.ch\dfs\Applications\Altium\Datasheets\IND_WURTH_WE-PMI_74479773210.pdf, LatestRevisionDate=8/26/2019, Mounted=Yes, Part Description="Power Multilayer Inductor (WE-PMI Series)", Part Number=IND0805_1UH_20%_WURTH_74479773210, Pin Count=2, Sense=No, SMD=Yes, Socket=No
L3 L4 L7A L7B: library part IND0603_MURATA_BLM18BD601SN1D, Case=0603, Manufacturer=MURATA, Manufacturer Part Number=BLM18BD601SN1D, Power=200mA, Resistance=0.65R, Tolerance=±25%, Author="CERN DEM JLC", Component Type=Standard, ComponentHeight=0.95mm, CreateDate=7/4/2012, HelpURL=\\cern.ch\dfs\Applications\Altium\Datasheets\IND0603_MURATA_BLM18B.pdf, LatestRevisionDate=10/25/2018, Mounted=Yes, Part Description="SMD EMIFIL Suppression Chip Ferrite Bead", Part Number=IND0603_MURATA_BLM18BD601SN1D, Pin Count=2, Sense=No, SMD=Yes, Socket=No
L5A L5B: library part IND_47UH_10%_MURATA_LQH32CN470K23L, "Inductor With Core", Manufacturer=MURATA, Manufacturer Part Number=LQH32CN470K23, Power=170mA, Resistance=1.3R, Tolerance=±10%, Author="CERN DEM JLC", Component Type=Standard, ComponentHeight=2.2mm, CreateDate=1/20/2009, HelpURL=\\cern.ch\dfs\Applications\Altium\Datasheets\IND_MURATA_LQH32CN_23.pdf, LatestRevisionDate=7/4/2018, Mounted=Yes, Part Description="Chip Inductor (Chip Coil) for Choke Wire Wound Type", Part Number=IND_47UH_10%_MURATA_LQH32CN470K23L, Pin Count=2, Sense=No, SMD=Yes, Socket=No
L6A L6B: library part IND_10UH_10%_MURATA_LQH32CN100K33L, "Inductor With Core", Manufacturer=MURATA, Manufacturer Part Number=LQH32CN100K33, Power=450mA, Resistance=0.3R, Tolerance=±10%, Author="CERN DEM JLC", Component Type=Standard, ComponentHeight=2.2mm, CreateDate=4/6/2009, HelpURL=\\cern.ch\dfs\Applications\Altium\Datasheets\IND_MURATA_LQH32CN_33.pdf, LatestRevisionDate=7/4/2018, Mounted=Yes, Part Description="Chip Inductor (Chip Coil) for Choke Wire Wound Type", Part Number=IND_10UH_10%_MURATA_LQH32CN100K33L, Pin Count=2, Sense=No, SMD=Yes, Socket=No
L10: library part IND_250UH_50%_WURTH_WE-SL2-744224, "Inductor Common Mode", Manufacturer="WURTH ELEKTRONIK", Manufacturer Part Number=744224, Power=1.2A, Resistance=0.13R, Tolerance=±50%, Author="CERN DEM JLC", Component Type=Standard, ComponentHeight=5.3mm, CreateDate=02.12.2009, HelpURL=\\cern.ch\dfs\Applications\Altium\Datasheets\IND_WURTH_WE-SL2_744224.pdf, LatestRevisionDate=15.10.2012, Mounted=Yes, Part Description="Common Mode SMD Line Filter (WE-SL2 Series)", Part Number=IND_250UH_50%_WURTH_WE-SL2-744224, Pin Count=4, Sense=No, SMD=Yes, Socket=No
LD1 LD2 LD10: library part LED_KINGBRIGHT_KP-1608CGCK, "LED Green 1C 2A", Case=0603, Manufacturer=KINGBRIGHT, Manufacturer Part Number=KP-1608CGCK, Author="CERN DEM HF", Bonding=No, Color=Green, Component Type=Standard, ComponentHeight=1.1mm, CreateDate=10/1/2021, HelpURL=\\cern.ch\dfs\Applications\Altium\Datasheets\LED_KINGBRIGHT_KP-1608CGCK.pdf, LatestRevisionDate=10/1/2021, Mounted=Yes, PackageDescription="SMT Green LED, Case 0603, Body L 1.60mm x W 0.80mm x H 1.10mm", Part Description="1.6x0.8mm SMD Chip Green LED Lamp", Part Number=LED_KINGBRIGHT_KP-1608CGCK, Pin Count=2, PressFit=No, Sense=No, SMD=Yes, Socket=No
LD9: library part LED_AVAGO_HSMC-C110, "LED Red 1C 2A", Case=1206, Manufacturer="AVAGO TECHNOLOGIES", Manufacturer Part Number=HSMC-C110, Author="CERN DEM JMW", Bonding=No, Color=Red, Component Type=Standard, ComponentHeight=1.1mm, ComponentLink1Description="Design Guide", ComponentLink1URL=\\cern.ch\dfs\Applications\Altium\Datasheets\LED_AVAGO_HSMC-C110_DESIGN-GUIDE.pdf, CreateDate=30.07.2009, HelpURL=\\cern.ch\dfs\Applications\Altium\Datasheets\LED_AVAGO_HSMC-C110.pdf, LatestRevisionDate=20.06.2012, Mounted=Yes, PackageDescription="Red Chip LED, 2-Leads, Body 3.3x1.6mm, Side Emitting Package", Part Description="High Performance Right Angle Chip Red LED", Part Number=LED_AVAGO_HSMC-C110, Pin Count=2, PressFit=No, Sense=No, SMD=Yes, Socket=No, Status="Not Recommended"
LD11: library part LED_AVAGO_HSME-C110, "LED Green 1C 2A", Case=1206, Manufacturer="AVAGO TECHNOLOGIES", Manufacturer Part Number=HSME-C110, Author="CERN DEM JMW", Bonding=No, Color=Green, Component Type=Standard, ComponentHeight=1.1mm, ComponentLink1Description="Design Guide", ComponentLink1URL=\\cern.ch\dfs\Applications\Altium\Datasheets\LED_AVAGO_HSME-C110_DESIGN-GUIDE.pdf, CreateDate=30.07.2009, HelpURL=\\cern.ch\dfs\Applications\Altium\Datasheets\LED_AVAGO_HSME-C110.pdf, LatestRevisionDate=20.06.2012, Mounted=Yes, PackageDescription="Green Chip LED, 2-Leads, Body 3.3x1.6mm, Side Emitting Package", Part Description="High Performance Right Angle Chip Green LED", Part Number=LED_AVAGO_HSME-C110, Pin Count=2, PressFit=No, Sense=No, SMD=Yes, Socket=No, Status="Not Recommended"
M1 M2: library part PLATED_HOLE3.0_PAD6.0, "Single Terminal Socket", Author="CERN DEM JLC", Component Type="Standard (No BOM)", ComponentHeight=0mm, CreateDate=26.05.2008, Family="Plated Hole", LatestRevisionDate=26.05.2008, Mounted=No, PackageDescription="Plated Through Hole: Hole Dia.=3.0mm Pad Dia.=6.0mm", Part Description="Plated Through Hole: Hole Dia.=3.0mm Pad Dia.=6.0mm", Part Number=PLATED_HOLE3.0_PAD6.0, Pin Count=1, SMD=No, Socket=No, Status=None, Table=Pads
P1: library part TRIM_1T_10K_BOURNS_3314G-1-103E, "Trimming Potentiometer", Case=3314G-1, Manufacturer=BOURNS, Manufacturer Part Number=3314G-1-103E, Power=0.25W, Tolerance=±20%, Author="CERN DEM JLC", Component Type=Standard, ComponentHeight=2.55mm, CreateDate=3/4/2014, HelpURL=\\cern.ch\dfs\Applications\Altium\Datasheets\TRIM_BOURNS_3314G-1.pdf, LatestRevisionDate=3/4/2014, Mounted=Yes, Part Description="Single Turn 4mm Square Trimpot® Trimming Potentiometer (Top Adjust)", Part Number=TRIM_1T_10K_BOURNS_3314G-1-103E, Pin Count=3, PressFit=No, Sense=No, SMD=Yes, Socket=No, TC=±100ppm/°C
R1: library part R0805_1M1_1%_0.125W_100PPM, "Resistor - 1%", Case=0805, Manufacturer=GENERIC, Manufacturer1 ComponentHeight=0.6mm, Manufacturer1 Example="NIC COMPONENT", Manufacturer1 Part Number=NRC10F1104TRF, Author="CERN DEM JLC", Component Type=Standard, CreateDate=03/12/2007, HelpURL=\\cern.ch\dfs\Applications\Altium\Datasheets\R0805_NIC_NRC.pdf, LatestRevisionDate=13/03/2008, Manufacturer Part Number=R0805_1M1_1%_0.125W_100PPM, Mounted=Yes, Part Description="General Purpose Thick Film Chip Resistor", Part Number=R0805_1M1_1%_0.125W_100PPM, Pin Count=2, PressFit=No, Sense=No, SMD=Yes, Socket=No, Status=Preferred